# Altium PCB MachLoa.PcbDoc
Units mm, origin at the board's own origin, x right, y up, seen from the top; angles counter-clockwise.
Board outline 86.61 x 107.06 mm, 2 copper layers (Top Layer, Bottom Layer); 124 components, 20 nets, 344 pads, 16 vias.
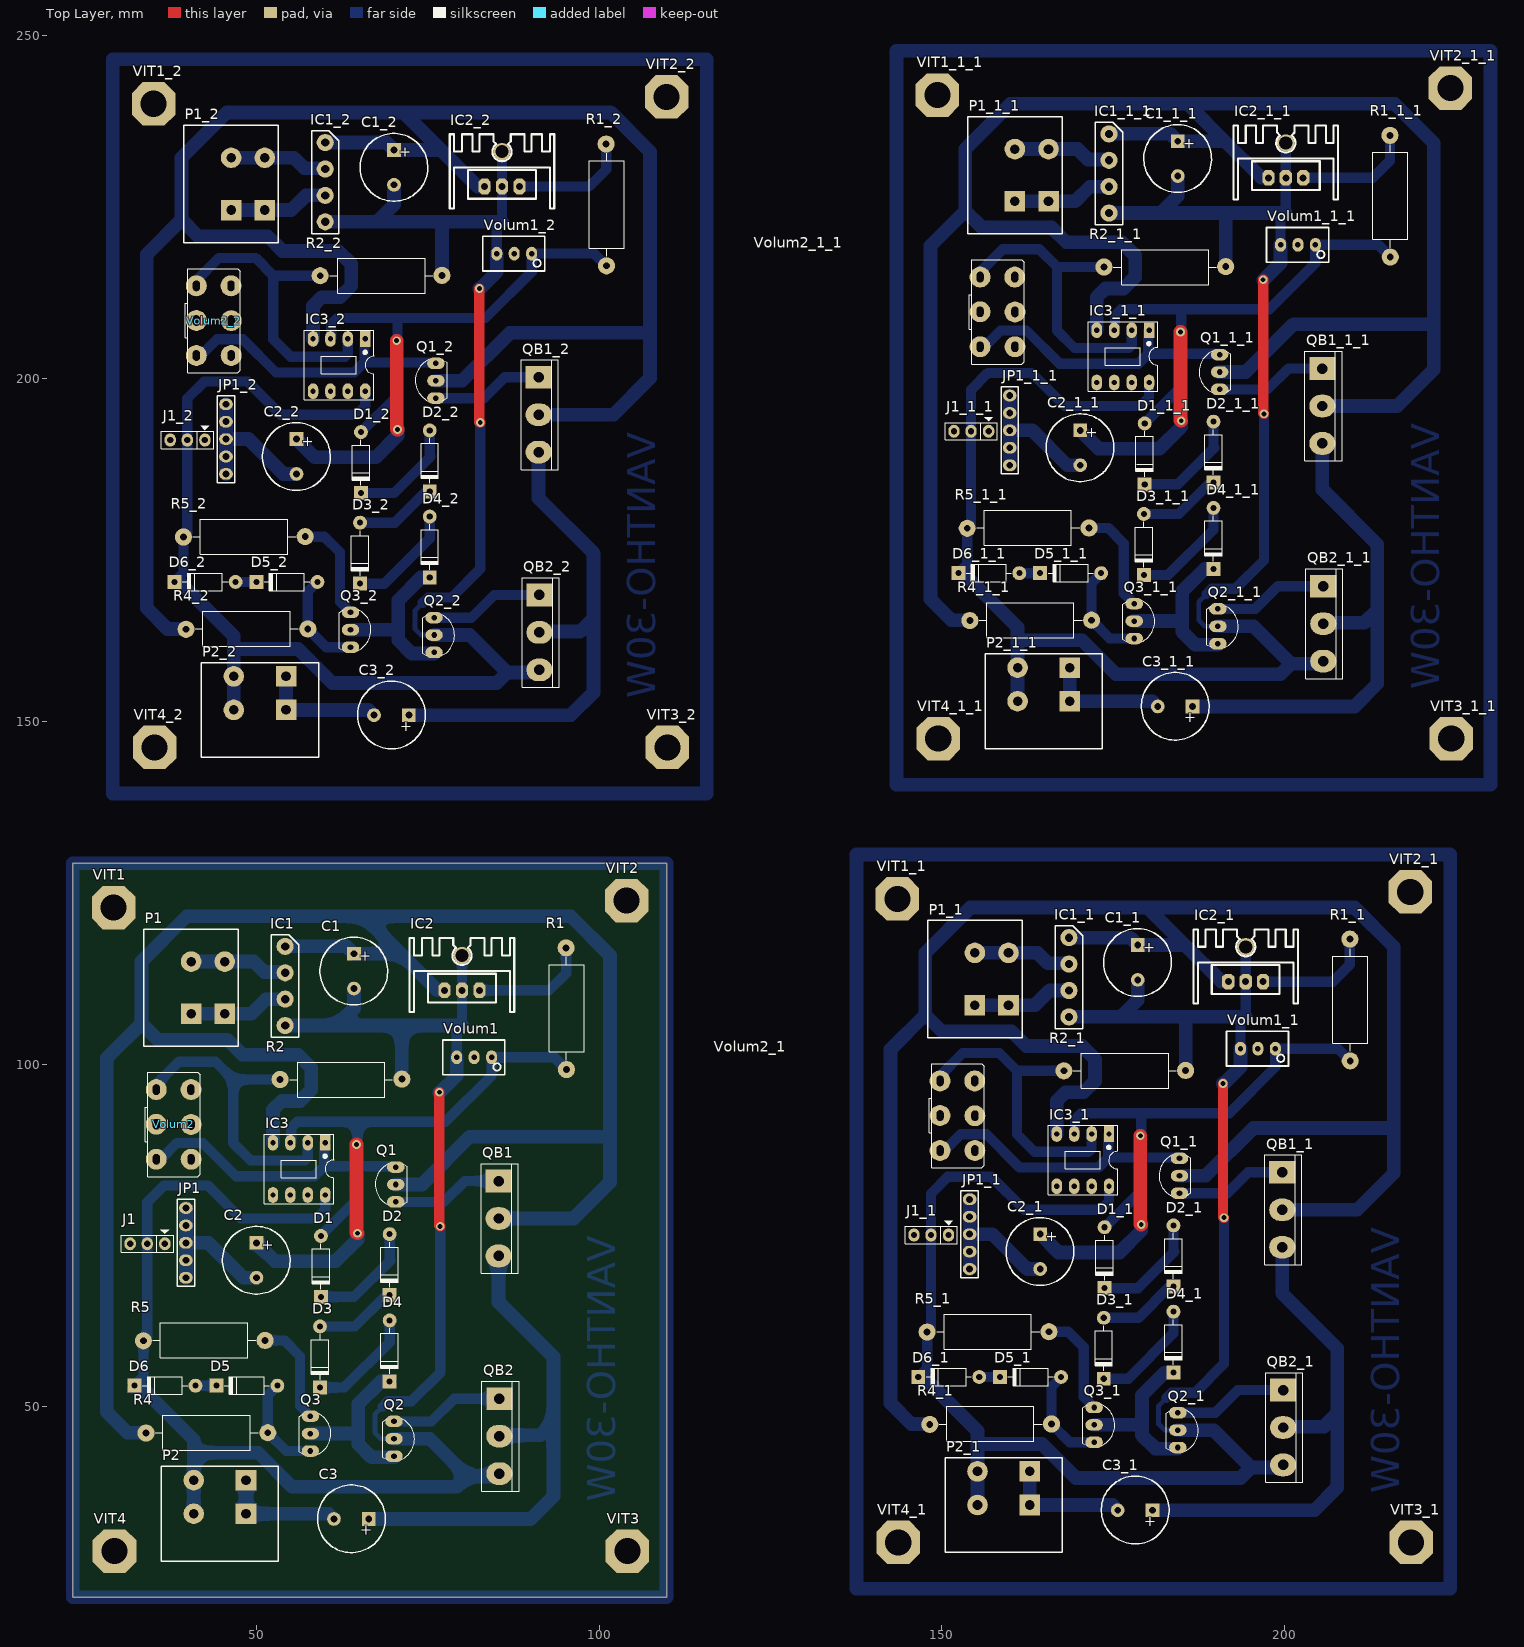
[diagram p0: Top Layer view]
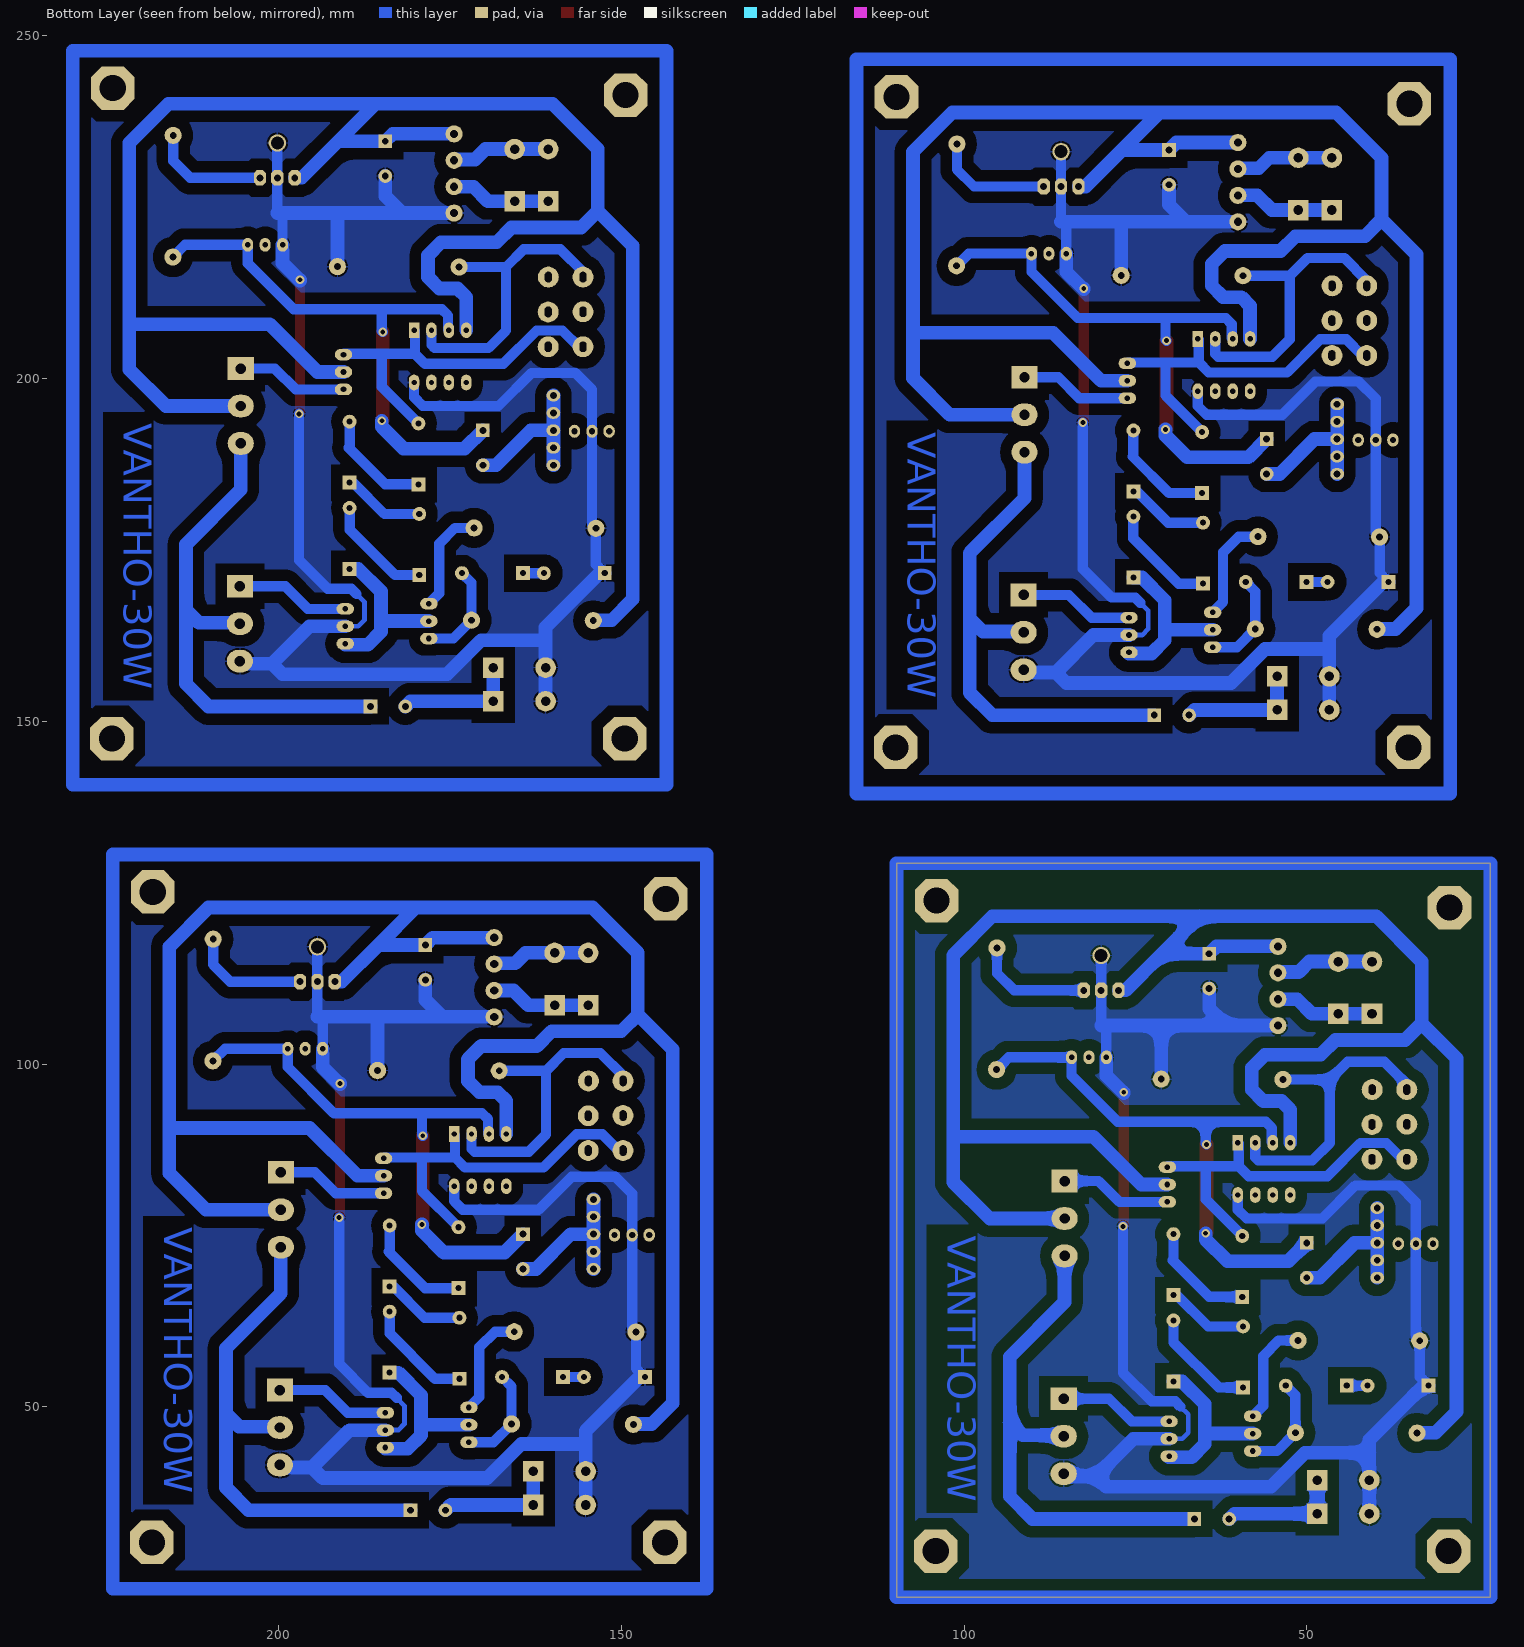
[diagram p1: Bottom Layer view, seen from below]

## Layer stack, top to bottom
Top Solder: solder mask 0.0102, Solder Resist, Dk 3.5
Top Layer: signal copper 0.0356
Dielectric 1: dielectric 0.32, FR-4, Dk 4.8
Bottom Layer: signal copper 0.0356
Bottom Solder: solder mask 0.0102, Solder Resist, Dk 3.5

## Board outline
23.241,22.225 23.241,129.286 109.855,129.286 109.855,22.225

## Design rules (kind name [scope] priority, off if disabled: settings)
Clearance [All] p1: gap=1.7 ignorepadtopadclearanceinfootprint=FALSE
PolygonConnect [All] p1: connectstyle=Relief reliefconductorwidth=0.254 reliefentries=4 polygonreliefangle="90 Angle" airgapwidth=0.254
RoutingVias [All] p1: holewidth=0.711 width=1.27 viastyle="Through Hole" minholewidth=0.711 minwidth=1.27 maxholewidth=0.711 maxwidth=1.27
SolderMaskExpansion [All] p1: expansion=0.102
Width [All] p1: maxlimit=2 minlimit=0.7 preferedwidth=1.5
30 further rules are at their usual default settings.

## Classes and differential pairs
component class MachLoa: C1 C2 C3 D1 D2 D3 D4 D5 D6 IC1 IC2 IC3 J1 JP1 P1 P2 Q1 Q2 Q3 QB1 QB2 R1 R2 R4 R5 VIT1 VIT2 VIT3 VIT4 Volum1 Volum2

## Components (designator, comment, footprint, x,y, rotation, side; value= is the part's Value field where it differs from the comment)
C1 "2200uF" C10mm 64.262,113.538 r270 top
C1_1 "2200uF" C10mm 178.562,114.808 r270 top (schematic designator C1)
C1_1_1 "2200uF" C10mm 184.404,232.029 r270 top (schematic designator C1)
C1_2 "2200uF" C10mm 70.104,230.759 r270 top (schematic designator C1)
C2 "4.7uF" C10mm 50.038,71.374 r270 top
C2_1 "4.7uF" C10mm 164.338,72.644 r270 top (schematic designator C2)
C2_1_1 "4.7uF" C10mm 170.18,189.865 r270 top (schematic designator C2)
C2_2 "4.7uF" C10mm 55.88,188.595 r270 top (schematic designator C2)
C3 "1000uF" C10mm 63.881,33.655 r180 top
C3_1 "1000uF" C10mm 178.181,34.925 r180 top (schematic designator C3)
C3_1_1 "1000uF" C10mm 184.023,152.146 r180 top (schematic designator C3)
C3_2 "1000uF" C10mm 69.723,150.876 r180 top (schematic designator C3)
D1 "1N4007" D1A 59.436,74.93 r90 top
D1_1 "1N4007" D1A 173.736,76.2 r90 top (schematic designator D1)
D1_1_1 "1N4007" D1A 179.578,193.421 r90 top (schematic designator D1)
D1_2 "1N4007" D1A 65.278,192.151 r90 top (schematic designator D1)
D2 "1N4007" D1A 69.469,75.184 r90 top
D2_1 "1N4007" D1A 183.769,76.454 r90 top (schematic designator D2)
D2_1_1 "1N4007" D1A 189.611,193.675 r90 top (schematic designator D2)
D2_2 "1N4007" D1A 75.311,192.405 r90 top (schematic designator D2)
D3 "1N4007" D1A 59.309,61.722 r90 top
D3_1 "1N4007" D1A 173.609,62.992 r90 top (schematic designator D3)
D3_1_1 "1N4007" D1A 179.451,180.213 r90 top (schematic designator D3)
D3_2 "1N4007" D1A 65.151,178.943 r90 top (schematic designator D3)
D4 "1N4007" D1A 69.469,62.611 r90 top
D4_1 "1N4007" D1A 183.769,63.881 r90 top (schematic designator D4)
D4_1_1 "1N4007" D1A 189.611,181.102 r90 top (schematic designator D4)
D4_2 "1N4007" D1A 75.311,179.832 r90 top (schematic designator D4)
D5 "1N4007" D1A 53.086,53.086 r0 top
D5_1 "1N4007" D1A 167.386,54.356 r0 top (schematic designator D5)
D5_1_1 "1N4007" D1A 173.228,171.577 r0 top (schematic designator D5)
D5_2 "1N4007" D1A 58.928,170.307 r0 top (schematic designator D5)
D6 "1N4007" D1A 41.148,53.086 r0 top
D6_1 "1N4007" D1A 155.448,54.356 r0 top (schematic designator D6)
D6_1_1 "1N4007" D1A 161.29,171.577 r0 top (schematic designator D6)
D6_2 "1N4007" D1A 46.99,170.307 r0 top (schematic designator D6)
IC1 "Diode Cau 3A 700V" "diode cau" 54.229,111.379 r270 top
IC1_1 "Diode Cau 3A 700V" "diode cau" 168.529,112.649 r270 top (schematic designator IC1)
IC1_1_1 "Diode Cau 3A 700V" "diode cau" 174.371,229.87 r270 top (schematic designator IC1)
IC1_2 "Diode Cau 3A 700V" "diode cau" 60.071,228.6 r270 top (schematic designator IC1)
IC2 "LM7805" QTO-220H3 77.47,110.744 r0 top
IC2_1 "LM7805" QTO-220H3 191.77,112.014 r0 top (schematic designator IC2)
IC2_1_1 "LM7805" QTO-220H3 197.612,229.235 r0 top (schematic designator IC2)
IC2_2 "LM7805" QTO-220H3 83.312,227.965 r0 top (schematic designator IC2)
IC3 "LM358" DIP8/W0.3 60.071,88.519 r180 top
IC3_1 "LM358" DIP8/W0.3 174.371,89.789 r180 top (schematic designator IC3)
IC3_1_1 "LM358" DIP8/W0.3 180.213,207.01 r180 top (schematic designator IC3)
IC3_2 "LM358" DIP8/W0.3 65.913,205.74 r180 top (schematic designator IC3)
J1 "Jumper 3" JP3 34.138,73.787 r180 top value=J3
J1_1 "Jumper 3" JP3 148.438,75.057 r180 top value=J3 (schematic designator J1)
J1_1_1 "Jumper 3" JP3 154.28,192.278 r180 top value=J3 (schematic designator J1)
J1_2 "Jumper 3" JP3 39.98,191.008 r180 top value=J3 (schematic designator J1)
JP1 "2.54_5P" "jump don duc 2.54_5p" 39.751,73.914 r90 top
JP1_1 "2.54_5P" "jump don duc 2.54_5p" 154.051,75.184 r90 top (schematic designator JP1)
JP1_1_1 "2.54_5P" "jump don duc 2.54_5p" 159.893,192.405 r90 top (schematic designator JP1)
JP1_2 "2.54_5P" "jump don duc 2.54_5p" 45.593,191.135 r90 top (schematic designator JP1)
P1 "KF25C_2P" KF25C_2P 47.413,102.58 r90 top
P1_1 "KF25C_2P" KF25C_2P 161.713,103.85 r90 top (schematic designator P1)
P1_1_1 "KF25C_2P" KF25C_2P 167.555,221.071 r90 top (schematic designator P1)
P1_2 "KF25C_2P" KF25C_2P 53.255,219.801 r90 top (schematic designator P1)
P2 "LOA" KF25C_2P 53.249,41.317 r180 top value=KF25C_2P
P2_1 "LOA" KF25C_2P 167.549,42.587 r180 top value=KF25C_2P (schematic designator P2)
P2_1_1 "LOA" KF25C_2P 173.391,159.808 r180 top value=KF25C_2P (schematic designator P2)
P2_2 "LOA" KF25C_2P 59.091,158.538 r180 top value=KF25C_2P (schematic designator P2)
Q1 "C1815" QTO-92 70.358,82.423 r90 top
Q1_1 "C1815" QTO-92 184.658,83.693 r90 top (schematic designator Q1)
Q1_1_1 "C1815" QTO-92 190.5,200.914 r90 top (schematic designator Q1)
Q1_2 "C1815" QTO-92 76.2,199.644 r90 top (schematic designator Q1)
Q2 "A1015" QTO-92 70.104,45.339 r270 top
Q2_1 "A1015" QTO-92 184.404,46.609 r270 top (schematic designator Q2)
Q2_1_1 "A1015" QTO-92 190.246,163.83 r270 top (schematic designator Q2)
Q2_2 "A1015" QTO-92 75.946,162.56 r270 top (schematic designator Q2)
Q3 "C1815" QTO-92 57.912,46.101 r270 top
Q3_1 "C1815" QTO-92 172.212,47.371 r270 top (schematic designator Q3)
Q3_1_1 "C1815" QTO-92 178.054,164.592 r270 top (schematic designator Q3)
Q3_2 "C1815" QTO-92 63.754,163.322 r270 top (schematic designator Q3)
QB1 "D718" QTO-247 85.344,82.931 r270 top
QB1_1 "D718" QTO-247 199.644,84.201 r270 top (schematic designator QB1)
QB1_1_1 "D718" QTO-247 205.486,201.422 r270 top (schematic designator QB1)
QB1_2 "D718" QTO-247 91.186,200.152 r270 top (schematic designator QB1)
QB2 "B688" QTO-247 85.471,51.181 r270 top
QB2_1 "B688" QTO-247 199.771,52.451 r270 top (schematic designator QB2)
QB2_1_1 "B688" QTO-247 205.613,169.672 r270 top (schematic designator QB2)
QB2_2 "B688" QTO-247 91.313,168.402 r270 top (schematic designator QB2)
R1 "100K" R2W 95.25,99.187 r90 top value="R2W - 47"
R1_1 "100K" R2W 209.55,100.457 r90 top value="R2W - 47" (schematic designator R1)
R1_1_1 "100K" R2W 215.392,217.678 r90 top value="R2W - 47" (schematic designator R1)
R1_2 "100K" R2W 101.092,216.408 r90 top value="R2W - 47" (schematic designator R1)
R2 "4.7K" R2W 53.492,97.739 r0 top value="R2W - 47"
R2_1 "4.7K" R2W 167.792,99.009 r0 top value="R2W - 47" (schematic designator R2)
R2_1_1 "4.7K" R2W 173.634,216.23 r0 top value="R2W - 47" (schematic designator R2)
R2_2 "4.7K" R2W 59.334,214.96 r0 top value="R2W - 47" (schematic designator R2)
R4 "100K" R2W 51.689,46.228 r180 top value="R2W - 47"
R4_1 "100K" R2W 165.989,47.498 r180 top value="R2W - 47" (schematic designator R4)
R4_1_1 "100K" R2W 171.831,164.719 r180 top value="R2W - 47" (schematic designator R4)
R4_2 "100K" R2W 57.531,163.449 r180 top value="R2W - 47" (schematic designator R4)
R5 "560" R2W 51.308,59.69 r180 top value="R2W - 47"
R5_1 "560" R2W 165.608,60.96 r180 top value="R2W - 47" (schematic designator R5)
R5_1_1 "560" R2W 171.45,178.181 r180 top value="R2W - 47" (schematic designator R5)
R5_2 "560" R2W 57.15,176.911 r180 top value="R2W - 47" (schematic designator R5)
VIT1 "1" VIT 29.21,122.809 r0 top
VIT1_1 "1" VIT 143.51,124.079 r0 top (schematic designator VIT1)
VIT1_1_1 "1" VIT 149.352,241.3 r0 top (schematic designator VIT1)
VIT1_2 "1" VIT 35.052,240.03 r0 top (schematic designator VIT1)
VIT2 "1" VIT 104.013,123.825 r0 top
VIT2_1 "1" VIT 218.313,125.095 r0 top (schematic designator VIT2)
VIT2_1_1 "1" VIT 224.155,242.316 r0 top (schematic designator VIT2)
VIT2_2 "1" VIT 109.855,241.046 r0 top (schematic designator VIT2)
VIT3 "1" VIT 104.14,28.956 r0 top
VIT3_1 "1" VIT 218.44,30.226 r0 top (schematic designator VIT3)
VIT3_1_1 "1" VIT 224.282,147.447 r0 top (schematic designator VIT3)
VIT3_2 "1" VIT 109.982,146.177 r0 top (schematic designator VIT3)
VIT4 "1" VIT 29.337,28.956 r0 top
VIT4_1 "1" VIT 143.637,30.226 r0 top (schematic designator VIT4)
VIT4_1_1 "1" VIT 149.479,147.447 r0 top (schematic designator VIT4)
VIT4_2 "1" VIT 35.179,146.177 r0 top (schematic designator VIT4)
Volum1 "50K" "BIEN TRO VI CHINH Dung" 81.788,100.965 r180 top value="Volume Dual 50K"
Volum1_1 "50K" "BIEN TRO VI CHINH Dung" 196.088,102.235 r180 top value="Volume Dual 50K" (schematic designator Volum1)
Volum1_1_1 "50K" "BIEN TRO VI CHINH Dung" 201.93,219.456 r180 top value="Volume Dual 50K" (schematic designator Volum1)
Volum1_2 "50K" "BIEN TRO VI CHINH Dung" 87.63,218.186 r180 top value="Volume Dual 50K" (schematic designator Volum1)
Volum2 "50K" VOL-D 35.433,91.186 r270 top value="Volume Dual 50K"
Volum2_1 "50K" VOL-D 149.733,92.456 r270 top value="Volume Dual 50K" (schematic designator Volum2)
Volum2_1_1 "50K" VOL-D 155.575,209.677 r270 top value="Volume Dual 50K" (schematic designator Volum2)
Volum2_2 "50K" VOL-D 41.275,208.407 r270 top value="Volume Dual 50K" (schematic designator Volum2)

## Footprints (in the part's own frame and the unit in brackets; to place one, negate y for a bottom-side part, rotate by r counter-clockwise, add the part's x,y. Pads: shape width x height; smd on the part's side, far side on the other; paste and mask are expansions set on the pad)
"BIEN TRO VI CHINH Dung" [mm] "Bien tro vi chinh"
  oval 1.6x2 hole 0.8: 1(-2.54,0) 2(0,0) 3(2.54,0)
  silkscreen extent -4.47,-2.54 4.6,2.54, body extent -4.54,-2.4 4.66,2.4, height 12.02
C10mm [mm]
  rect 2x2 hole 1: 1(-2.54,0)
  round 2 hole 1: 2(2.54,0)
  silkscreen extent -4.95,-4.96 4.93,4.92, body extent -5,-5 4.97,5, height 20.01
D1A [mil] "Diode 1A, W 100mil, L 350mil"
  round 80 hole 35: 1(0,0)
  rect 80x80 hole 35: 2(-350,0)
  silkscreen extent -305,-50 -45,50, body extent -386,-33 34,36, height 84
"diode cau" [mm]
  round 2.5 hole 1.2 mask+0.102: 1(-5.775,0) 2(-1.925,0) 3(1.925,0) 4(5.775,0)
  silkscreen extent -7.5,-2 7.5,2, body extent -7.37,-2.42 7.36,2.41, height 12.19
DIP8/W0.3 [mil] "8 PIN, W 300mil, Pin to pin 100mil"
  rect 60x90 hole 31: 1(0,0)
  oval 60x90 hole 31: 2(100,0) 3(200,0) 4(300,0) 5(300,300) 6(200,300) 7(100,300) 8(0,300)
  silkscreen extent -50,-50 350,350, body extent -50,-40 350,336, height 201
JP3 [mil] "Jumper 3"
  oval 65x75 hole 36: 1(-100,0) 2(1,0) 3(99,0)
  silkscreen extent -150,-81 150,50, body extent -150,-60 150,55, height 355
"jump don duc 2.54_5p" [mm]
  oval 1.7x2 hole 1 mask+0.102: 1(-5.08,0) 2(-2.54,0) 3(0,0) 4(2.54,0) 5(5.08,0)
  silkscreen extent -6.35,-1.27 6.35,1.27, body extent -6.35,-1.25 6.35,1.25, height 8.55
KF25C_2P [mm]
  rect 3x3 hole 1.4: 1(4.735,6.9) 1(4.735,2)
  round 3 hole 1.4: 2(12.355,2) 2(12.355,6.9)
  silkscreen extent 0,0 17.09,13.8, body extent 0.92,0.6 16.16,10.6, height 10.4
QTO-92 [mil] "TO-92"
  oval 66x100 hole 32: 1(-100,0) 2(0,0) 3(100,0)
  silkscreen extent -117,-65 120,118, body extent -109,-66 109,95, height 245
QTO-220H3 [mil] "TO-220 1-2-3"
  oct 70x90 hole 40: 1(0,0) 2(100,0) 3(200,0)
  round 100 hole 75: 2(100,200)
  silkscreen extent -200,-125 400,300, body extent -190,-102 392,323, height 984
QTO-247 [mil] "TO-247"
  rect 130x150 hole 60: 1(0,0)
  oval 130x150 hole 60: 2(215,0) 3(430,0)
  silkscreen extent -100,-100 530,113, body extent -89,-78 511,102, height 941
R2W [mm] "R2W, 2 pin, 700mil"
  round 2.5 hole 1: 1(0,0) 2(17.755,0.051)
  silkscreen extent 1.37,-2.57 16.38,2.54, body extent -2.36,-3.33 19.84,3.27, height 8.3
VIT [mm] "VIT"
  oct 6.35x6.35 hole 3.81: VIT1(0,0)
VOL-D [mil] "Volume control Dual"
  round 120 hole 40 slot 60 at 0 deg: 1(-200,0) 2(-1,0) 3(200,0) 4(-200,199) 5(0,200) 6(200,200)
  silkscreen extent -299,-63 300,253, body extent -339,-1309 331,299, height 835

## Part data
C1 C1_1 C1_1_1 C1_2 C2 C2_1 C2_1_1 C2_2 C3 C3_1 C3_1_1 C3_2: library part "Cap Pol 12mm", "Polarized Capacitor (Axial)", LatestRevisionDate=17-Jul-2002, LatestRevisionNote="Re-released for DXP Platform.", PackageReference=POLAR0.8, Published=8-Jun-2000, Publisher="Altium Limited"
D1 D1_1 D1_1_1 D1_2 D2 D2_1 D2_1_1 D2_2 D3 D3_1 D3_1_1 D3_2 D4 D4_1 D4_1_1 D4_2 D5 D5_1 D5_1_1 D5_2 D6 D6_1 D6_1_1 D6_2: library part D1A, "Diode 1A"
IC1 IC1_1 IC1_1_1 IC1_2: "C?m", Chung_Loai=C?m, Don_Vi=Con, Ma_Hang=MH001207, So_Chan=4, Ten_Linh_Kien="Diode C?u 3A 700V KBP307 (Vuông)"
IC2 IC2_1 IC2_1_1 IC2_2: library part LM78xx, "On ap +, from + 5 to + 24VDC", =LM7808
IC3 IC3_1 IC3_1_1 IC3_2: "Low-Power Dual Operational Amplifier"
J1 J1_1 J1_1_1 J1_2: library part JP3
JP1 JP1_1 JP1_1_1 JP1_2: library part "Jump Don Duc 2.54_5P", "C?m", Chung_Loai=C?m, Don_Vi=Con, Ma_Hang=MH000903, So_Chan=5, Ten_Linh_Kien="Jump Ðon Ð?c 2.54MM 2x40P Th?ng 11MM"
P1 P1_1 P1_1_1 P1_2: "Header, 2-Pin, pitch 7.62mm", MPN=KF25C_2P, Solder=WAVE
P2 P2_1 P2_1_1 P2_2: library part KF25C_2P, "Header, 2-Pin, pitch 7.62mm", MPN=KF25C_2P, Solder=WAVE
Q1 Q1_1 Q1_1_1 Q1_2 Q3 Q3_1 Q3_1_1 Q3_2: "NPN 600mW, ECB", =C2383
Q2 Q2_1 Q2_1_1 Q2_2: "PNP 600mW, ECB", =A1013
QB1 QB1_1 QB1_1_1 QB1_2 QB2 QB2_1 QB2_1_1 QB2_2: "Transistor Power Supply"
R1 R1_1 R1_1_1 R1_2 R2 R2_1 R2_1_1 R2_2 R4 R4_1 R4_1_1 R4_2 R5 R5_1 R5_1_1 R5_2: library part R2W, "Resistor 2W"
VIT1 VIT1_1 VIT1_1_1 VIT1_2 VIT2 VIT2_1 VIT2_1_1 VIT2_2 VIT3 VIT3_1 VIT3_1_1 VIT3_2 VIT4 VIT4_1 VIT4_1_1 VIT4_2: library part VIT, "Oc Vit"
Volum1 Volum1_1 Volum1_1_1 Volum1_2 Volum2 Volum2_1 Volum2_1_1 Volum2_2: library part VOL-D, "Volume control Dual"

## Via types
v1: diameter 1.27, hole 0.711, Top Layer to Bottom Layer, 16 vias

## Nets (pads, with @x,y where several pads share a name; then routed paths per layer and width w, separated by ;. In a path a pad name is that pad's centre, name@x,y a point inside that pad or via, vN(x,y) a via of type N, cw(c..) or ccw(c..) an arc to the next point about the centre after c; other vN are vias at no path point)
19V: C1.1 IC1.1 IC2.1 IC3.4 Q1.2 QB1.2 R4.2 | length 309.7
  Bottom Layer w2: R4.2 33.884,46.228 31.242,46.228 28.194,49.276 28.194,100.838 33.274,105.918 ; IC3.4 52.451,93.345 53.721,94.615 56.388,94.615 58.039,96.266 58.039,99.441 56.134,101.346 48.006,101.346 45.847,103.505 35.687,103.505 33.274,105.918 ; IC1.1 63.186,117.154 C1.1 71.12,116.078 ; Q1.2 74.168,82.423 81.153,89.408 101.6,89.408 ; IC2.1@77.421,110.744 76.454,110.744 71.12,116.078 ; QB1.2 96.266,77.47 101.6,82.804 101.6,89.408 ; 33.274,105.918 33.274,114.935 39.878,121.539 65.659,121.539 ; 65.659,121.539 95.885,121.539 101.6,115.824 101.6,89.408 ; 65.659,121.539 71.12,116.078
+5: IC2.3 R1.2 | length 17.4
  Bottom Layer w1.5: IC2.3 92.71,110.744 95.199,113.233 R1.2
GND: C1.2 D6.2 IC1.4 IC2.2 IC3.8 J1.2 P2.2 Q2.2 QB2.3 R2.2 R5.2 Volum1.3 | length 261.6
  Top Layer w1.5: v1(76.708,95.885) 76.708,76.454 v1(76.835,76.327)
  Bottom Layer w0.7: 68.453,50.038 67.31,48.895 67.31,46.228 68.199,45.339 Q2.2
  Bottom Layer w1.5: D6.2 33.553,54.381 R5.2 34.112,60.198 J1.2 34.112,79.832 36.576,82.296 42.926,82.296 47.752,77.47 58.801,77.47 60.071,78.74 IC3.8 ; 68.453,50.038 69.215,50.8 72.644,50.8 76.835,54.991 v1(76.835,76.327) ; Volum1.3 79.248,104.902 ; 80.01,105.604 80.01,110.744 IC2.2@80.01,115.824
  Bottom Layer w2: D6.2 33.02,53.086 40.894,45.212 40.894,43.307 ; P2.2@40.894,34.417 40.894,39.317 40.894,43.307 ; IC1.4 61.789,105.604 ; C1.2 64.262,108.077 61.789,105.604 ; Q2.2 75.311,45.339 80.772,39.878 ; R2.2 71.247,105.604 ; v1(76.708,95.885) 76.708,95.758 79.248,98.298 Volum1.3 ; 80.01,105.604 71.247,105.604 ; QB2.3 85.09,39.878 80.772,39.878 ; 40.894,43.307 50.292,43.307 55.245,38.354 79.248,38.354 80.772,39.878 ; 61.789,105.604 71.247,105.604
NetC2_1: C2.1 IC3.3 R1.1 Volum1.1 | length 83.3
  Top Layer w2: v1(64.643,88.265) 64.643,75.438 v1(64.77,75.311)
  Bottom Layer w1.5: IC3.3 55.118,88.646 55.118,90.678 56.007,91.567 64.77,91.567 ; v1(64.643,88.265) 64.77,88.392 64.77,91.567 ; R1.1 93.472,100.965 Volum1.1 84.328,98.298 77.597,91.567 64.77,91.567
  Bottom Layer w2: C2.1 52.705,71.247 61.595,71.247 64.77,74.422 v1(64.77,75.311)
NetC2_2: C2.2 JP1.1 JP1.2 JP1.3 JP1.4 JP1.5 | length 22.6
  Bottom Layer w2: JP1.1 JP1.2 JP1.3 ; JP1.5 JP1.4 JP1.3 ; C2.2 48.133,68.834 43.053,73.914 JP1.3
NetC3_1: C3.1 QB1.3 QB2.2 | length 75.4
  Bottom Layer w2: C3.1 90.043,33.655 93.345,36.957 93.345,47.752 ; QB1.3 85.344,65.278 93.345,57.277 93.345,47.752 ; QB2.2 85.598,45.847 91.44,45.847 93.345,47.752
NetC3_2: C3.2 P2.1 | length 18
  Bottom Layer w2: P2.1@48.514,39.317 48.514,34.417 60.579,34.417 C3.2
NetD1_1: D1.1 IC3.1 Q1.3 Volum2.3 | length 54.4
  Bottom Layer w1.5: Volum2.3 36.068,86.106 38.442,88.48 42.203,88.48 47.053,83.629 58.483,83.629 59.944,85.09 ; D1.1 64.77,80.264 64.77,85.09 ; IC3.1 59.944,88.392 59.944,85.09 ; Q1.3 70.231,85.09 64.77,85.09 ; 59.944,85.09 64.77,85.09
NetD1_2: D1.2 D2.1 | length 16.2
  Bottom Layer w1.5: D1.2 64.262,66.04 69.596,71.374 69.469,71.501 D2.1
NetD2_2: D2.2 D3.1 | length 12.1
  Bottom Layer w1.5: D3.1 64.389,61.722 68.961,66.294 D2.2
NetD3_2: D3.2 D4.1 | length 16.1
  Bottom Layer w1.5: D3.2 62.865,52.832 69.469,59.436 D4.1
NetD4_2: D4.2 Q2.3 Q3.2 | length 24.9
  Bottom Layer w2: Q3.2 64.516,46.101 64.897,46.482 ; D4.2 68.199,53.721 64.897,50.419 64.897,46.482 ; Q2.3@70.104,42.639 66.835,42.639 64.897,44.577 64.897,46.482
NetD5_1: D5.1 Q3.3 R4.1 | length 14.8
  Bottom Layer w1.5: D5.1 51.689,51.689 R4.1 54.356,43.561 Q3.3
NetD5_2: D5.2 D6.1 | length 3
  Bottom Layer w1.5: D6.1 D5.2
NetIC1_2: IC1.2 P1.2 | length 14.4
  Bottom Layer w2: P1.2@40.513,114.935 45.413,114.935 49.657,114.935 51.181,113.411 54.122,113.411 IC1.2
NetIC1_3: IC1.3 P1.1 | length 14.6
  Bottom Layer w2: P1.1@40.513,107.315 45.413,107.315 49.276,107.315 51.415,109.454 IC1.3
NetIC3_2: IC3.2 R2.1 Volum2.1 | length 44.8
  Bottom Layer w1.5: Volum2.1 35.433,97.028 38.735,100.33 44.069,100.33 46.66,97.739 ; R2.1 46.66,97.739 ; IC3.2 57.531,86.36 57.097,85.926 49.202,85.926 46.66,88.468 46.66,97.739
NetQ1_1: Q1.1 QB1.1 | length 16.2
  Bottom Layer w1.5: Q1.1 77.343,79.883 80.391,82.931 QB1.1
NetQ2_1: Q2.1 QB2.1 | length 16.7
  Bottom Layer w1.5: Q2.1 75.565,47.879 78.867,51.181 QB2.1
NetQ3_1: Q3.1 R5.1 | length 15.4
  Bottom Layer w1.5: R5.1 54.102,59.69 56.388,57.404 56.388,50.165 Q3.1
pads on no net: C1_1.1 C1_1.2 C1_1_1.1 C1_1_1.2 C1_2.1 C1_2.2 C2_1.1 C2_1.2 C2_1_1.1 C2_1_1.2 C2_2.1 C2_2.2 C3_1.1 C3_1.2 C3_1_1.1 C3_1_1.2 C3_2.1 C3_2.2 D1_1.1 D1_1.2 D1_1_1.1 D1_1_1.2 D1_2.1 D1_2.2 D2_1.1 D2_1.2 D2_1_1.1 D2_1_1.2 D2_2.1 D2_2.2 D3_1.1 D3_1.2 D3_1_1.1 D3_1_1.2 D3_2.1 D3_2.2 D4_1.1 D4_1.2 D4_1_1.1 D4_1_1.2 D4_2.1 D4_2.2 D5_1.1 D5_1.2 D5_1_1.1 D5_1_1.2 D5_2.1 D5_2.2 D6_1.1 D6_1.2 D6_1_1.1 D6_1_1.2 D6_2.1 D6_2.2 IC1_1.1 IC1_1.2 IC1_1.3 IC1_1.4 IC1_1_1.1 IC1_1_1.2 IC1_1_1.3 IC1_1_1.4 IC1_2.1 IC1_2.2 IC1_2.3 IC1_2.4 IC2_1.1 IC2_1.2 IC2_1.3 IC2_1_1.1 IC2_1_1.2 IC2_1_1.3 IC2_2.1 IC2_2.2 IC2_2.3 IC3.5 IC3.6 IC3.7 IC3_1.1 IC3_1.2 IC3_1.3 IC3_1.4 IC3_1.5 IC3_1.6 IC3_1.7 IC3_1.8 IC3_1_1.1 IC3_1_1.2 IC3_1_1.3 IC3_1_1.4 IC3_1_1.5 IC3_1_1.6 IC3_1_1.7 IC3_1_1.8 IC3_2.1 IC3_2.2 IC3_2.3 IC3_2.4 IC3_2.5 IC3_2.6 IC3_2.7 IC3_2.8 J1.1 J1.3 J1_1.1 J1_1.2 J1_1.3 J1_1_1.1 J1_1_1.2 J1_1_1.3 J1_2.1 J1_2.2 J1_2.3 JP1_1.1 JP1_1.2 JP1_1.3 JP1_1.4 JP1_1.5 JP1_1_1.1 JP1_1_1.2 JP1_1_1.3 JP1_1_1.4 JP1_1_1.5 JP1_2.1 JP1_2.2 JP1_2.3 JP1_2.4 JP1_2.5 P1_1.1 P1_1.2 P1_1_1.1 P1_1_1.2 P1_2.1 P1_2.2 P2_1.1 P2_1.2 P2_1_1.1 P2_1_1.2 P2_2.1 P2_2.2 Q1_1.1 Q1_1.2 Q1_1.3 Q1_1_1.1 Q1_1_1.2 Q1_1_1.3 Q1_2.1 Q1_2.2 Q1_2.3 Q2_1.1 Q2_1.2 Q2_1.3 Q2_1_1.1 Q2_1_1.2 Q2_1_1.3 Q2_2.1 Q2_2.2 Q2_2.3 Q3_1.1 Q3_1.2 Q3_1.3 Q3_1_1.1 Q3_1_1.2 Q3_1_1.3 Q3_2.1 Q3_2.2 Q3_2.3 QB1_1.1 QB1_1.2 QB1_1.3 QB1_1_1.1 QB1_1_1.2 QB1_1_1.3 QB1_2.1 QB1_2.2 QB1_2.3 QB2_1.1 QB2_1.2 QB2_1.3 QB2_1_1.1 QB2_1_1.2 QB2_1_1.3 QB2_2.1 QB2_2.2 QB2_2.3 R1_1.1 R1_1.2 R1_1_1.1 R1_1_1.2 R1_2.1 R1_2.2 R2_1.1 R2_1.2 R2_1_1.1 R2_1_1.2 R2_2.1 R2_2.2 R4_1.1 R4_1.2 R4_1_1.1 R4_1_1.2 R4_2.1 R4_2.2 R5_1.1 R5_1.2 R5_1_1.1 R5_1_1.2 R5_2.1 R5_2.2 VIT1.VIT1 VIT1_1.VIT1 VIT1_1_1.VIT1 VIT1_2.VIT1 VIT2.VIT1 VIT2_1.VIT1 VIT2_1_1.VIT1 VIT2_2.VIT1 VIT3.VIT1 VIT3_1.VIT1 VIT3_1_1.VIT1 VIT3_2.VIT1 VIT4.VIT1 VIT4_1.VIT1 VIT4_1_1.VIT1 VIT4_2.VIT1 Volum1.2 Volum1_1.1 Volum1_1.2 Volum1_1.3 Volum1_1_1.1 Volum1_1_1.2 Volum1_1_1.3 Volum1_2.1 Volum1_2.2 Volum1_2.3 Volum2.2 Volum2.4 Volum2.5 Volum2.6 Volum2_1.1 Volum2_1.2 Volum2_1.3 Volum2_1.4 Volum2_1.5 Volum2_1.6 Volum2_1_1.1 Volum2_1_1.2 Volum2_1_1.3 Volum2_1_1.4 Volum2_1_1.5 Volum2_1_1.6 Volum2_2.1 Volum2_2.2 Volum2_2.3 Volum2_2.4 Volum2_2.5 Volum2_2.6
copper on no net: | length 4704.3
  Top Layer w1.5: v1(82.55,213.106) 82.55,193.675 v1(82.677,193.548) ; v1(191.008,97.155) 191.008,77.724 v1(191.135,77.597) ; v1(196.85,214.376) 196.85,194.945 v1(196.977,194.818)
  Top Layer w2: v1(70.485,205.486) 70.485,192.659 v1(70.612,192.532) ; v1(178.943,89.535) 178.943,76.708 v1(179.07,76.581) ; v1(184.785,206.756) 184.785,193.929 v1(184.912,193.802)
  Bottom Layer w0.7: 74.295,167.259 73.152,166.116 73.152,163.449 74.041,162.56 75.946,162.56 ; 182.753,51.308 181.61,50.165 181.61,47.498 182.499,46.609 184.404,46.609 ; 188.595,168.529 187.452,167.386 187.452,164.719 188.341,163.83 190.246,163.83
  Bottom Layer w1.5: 38.1,170.307 39.395,171.602 39.395,176.86 39.954,177.419 39.954,191.008 39.954,197.053 42.418,199.517 48.768,199.517 53.594,194.691 64.643,194.691 65.913,195.961 65.913,198.12 ; 41.275,203.327 41.91,203.327 44.284,205.701 48.045,205.701 52.895,200.85 64.325,200.85 65.786,202.311 ; 41.275,213.487 41.275,214.249 44.577,217.551 49.911,217.551 52.502,214.96 ; 46.99,170.307 50.038,170.307 ; 57.15,176.911 59.944,176.911 62.23,174.625 62.23,167.386 63.754,165.862 ; 58.928,170.307 57.531,168.91 57.531,163.449 60.198,160.782 63.754,160.782 ; 59.334,214.96 52.502,214.96 ; 60.833,205.74 60.96,205.867 60.96,207.899 61.849,208.788 70.612,208.788 ; 63.373,205.74 63.373,203.581 62.939,203.147 55.044,203.147 52.502,205.689 52.502,214.96 ; 65.151,170.053 68.707,170.053 75.311,176.657 75.311,179.832 ; 65.151,178.943 70.231,178.943 74.803,183.515 75.311,183.515 ; 65.278,183.261 70.104,183.261 75.438,188.595 75.311,188.722 75.311,192.405 ; 65.278,192.151 70.612,197.485 70.612,202.311 ; 65.913,205.74 65.786,205.613 65.786,202.311 ; v1(70.485,205.486) 70.612,205.613 70.612,208.788 ; 74.295,167.259 75.057,168.021 78.486,168.021 82.677,172.212 v1(82.677,193.548) ; 75.946,165.1 81.407,165.1 84.709,168.402 91.313,168.402 ; 76.2,197.104 83.185,197.104 86.233,200.152 91.186,200.152 ; 76.2,202.184 76.073,202.311 70.612,202.311 ; 85.09,218.186 85.09,222.123 ; 85.852,222.825 85.852,227.965 85.852,233.045 ; 88.392,227.965 98.552,227.965 101.041,230.454 101.041,234.163 ; 101.092,216.408 99.314,218.186 90.17,218.186 90.17,215.519 83.439,208.788 70.612,208.788 ; 146.558,54.356 147.853,55.651 147.853,60.909 148.412,61.468 148.412,75.057 148.412,81.102 150.876,83.566 157.226,83.566 162.052,78.74 173.101,78.74 174.371,80.01 174.371,82.169 ; 149.733,87.376 150.368,87.376 152.742,89.75 156.503,89.75 161.353,84.9 172.784,84.9 174.244,86.36 ; 149.733,97.536 149.733,98.298 153.035,101.6 158.369,101.6 160.96,99.009 ; 152.4,171.577 153.695,172.872 153.695,178.13 154.254,178.689 154.254,192.278 154.254,198.323 156.718,200.787 163.068,200.787 167.894,195.961 178.943,195.961 180.213,197.231 180.213,199.39 ; 155.448,54.356 158.496,54.356 ; 155.575,204.597 156.21,204.597 158.584,206.971 162.345,206.971 167.195,202.12 178.625,202.12 180.086,203.581 ; 155.575,214.757 155.575,215.519 158.877,218.821 164.211,218.821 166.802,216.23 ; 161.29,171.577 164.338,171.577 ; 165.608,60.96 168.402,60.96 170.688,58.674 170.688,51.435 172.212,49.911 ; 167.386,54.356 165.989,52.959 165.989,47.498 168.656,44.831 172.212,44.831 ; 167.792,99.009 160.96,99.009 ; 169.291,89.789 169.418,89.916 169.418,91.948 170.307,92.837 179.07,92.837 ; 171.45,178.181 174.244,178.181 176.53,175.895 176.53,168.656 178.054,167.132 ; 171.831,89.789 171.831,87.63 171.397,87.196 163.502,87.196 160.96,89.738 160.96,99.009 ; 173.228,171.577 171.831,170.18 171.831,164.719 174.498,162.052 178.054,162.052 ; 173.609,54.102 177.165,54.102 183.769,60.706 183.769,63.881 ; 173.609,62.992 178.689,62.992 183.261,67.564 183.769,67.564 ; 173.634,216.23 166.802,216.23 ; 173.736,67.31 178.562,67.31 183.896,72.644 183.769,72.771 183.769,76.454 ; 173.736,76.2 179.07,81.534 179.07,86.36 ; 174.371,89.789 174.244,89.662 174.244,86.36 ; 175.133,207.01 175.26,207.137 175.26,209.169 176.149,210.058 184.912,210.058 ; 177.673,207.01 177.673,204.851 177.239,204.417 169.344,204.417 166.802,206.959 166.802,216.23 ; v1(178.943,89.535) 179.07,89.662 179.07,92.837 ; 179.451,171.323 183.007,171.323 189.611,177.927 189.611,181.102 ; 179.451,180.213 184.531,180.213 189.103,184.785 189.611,184.785 ; 179.578,184.531 184.404,184.531 189.738,189.865 189.611,189.992 189.611,193.675 ; 179.578,193.421 184.912,198.755 184.912,203.581 ; 180.213,207.01 180.086,206.883 180.086,203.581 ; 182.753,51.308 183.515,52.07 186.944,52.07 191.135,56.261 v1(191.135,77.597) ; 184.404,49.149 189.865,49.149 193.167,52.451 199.771,52.451 ; 184.658,81.153 191.643,81.153 194.691,84.201 199.644,84.201 ; 184.658,86.233 184.531,86.36 179.07,86.36 ; v1(184.785,206.756) 184.912,206.883 184.912,210.058 ; 188.595,168.529 189.357,169.291 192.786,169.291 196.977,173.482 v1(196.977,194.818) ; 190.246,166.37 195.707,166.37 199.009,169.672 205.613,169.672 ; 190.5,198.374 197.485,198.374 200.533,201.422 205.486,201.422 ; 190.5,203.454 190.373,203.581 184.912,203.581 ; 193.548,102.235 193.548,106.172 ; 194.31,106.874 194.31,112.014 194.31,117.094 ; 196.85,112.014 207.01,112.014 209.499,114.503 209.499,118.212 ; 199.39,219.456 199.39,223.393 ; 200.152,224.095 200.152,229.235 200.152,234.315 ; 202.692,229.235 212.852,229.235 215.341,231.724 215.341,235.433 ; 209.55,100.457 207.772,102.235 198.628,102.235 198.628,99.568 191.897,92.837 179.07,92.837 ; 215.392,217.678 213.614,219.456 204.47,219.456 204.47,216.789 197.739,210.058 184.912,210.058 ; 65.786,202.311 70.612,202.311 ; 174.244,86.36 179.07,86.36 ; 180.086,203.581 184.912,203.581
  Bottom Layer w2: 38.1,170.307 38.862,170.307 46.736,162.433 46.736,160.528 ; 39.776,163.398 39.726,163.449 37.084,163.449 34.036,166.497 34.036,218.059 39.116,223.139 ; 45.593,186.055 45.593,188.595 45.593,191.135 ; 45.593,196.215 45.593,193.675 45.593,191.135 ; 46.355,224.536 51.255,224.536 55.118,224.536 57.257,226.675 60.071,226.675 ; 46.355,232.156 51.255,232.156 55.499,232.156 57.023,230.632 59.964,230.632 60.071,230.525 ; 46.736,151.638 46.736,156.538 46.736,160.528 ; 54.356,156.538 54.356,151.638 66.421,151.638 67.183,150.876 ; 55.88,186.055 53.975,186.055 48.895,191.135 45.593,191.135 ; 55.88,191.135 58.547,188.468 67.437,188.468 70.612,191.643 v1(70.612,192.532) ; 58.293,205.74 58.293,210.566 59.563,211.836 62.23,211.836 63.881,213.487 63.881,216.662 61.976,218.567 53.848,218.567 51.689,220.726 41.529,220.726 39.116,223.139 ; 60.071,222.825 67.631,222.825 ; 60.071,234.375 69.028,234.375 70.104,233.299 76.962,233.299 ; 63.754,163.322 70.358,163.322 70.739,163.703 ; 70.104,228.219 70.104,225.298 67.631,222.825 ; 72.263,150.876 95.885,150.876 99.187,154.178 99.187,164.973 ; 75.311,170.942 74.041,170.942 70.739,167.64 70.739,163.703 ; 75.946,159.86 72.677,159.86 70.739,161.798 70.739,163.703 ; 75.946,162.56 81.153,162.56 86.614,157.099 ; 76.2,199.644 80.01,199.644 86.995,206.629 107.442,206.629 ; 77.089,215.011 77.089,222.825 ; v1(82.55,213.106) 82.55,212.979 85.09,215.519 85.09,218.186 ; 83.263,227.965 82.296,227.965 76.962,233.299 ; 85.852,222.825 77.089,222.825 ; 91.186,189.23 91.186,182.499 99.187,174.498 99.187,164.973 ; 91.186,194.691 102.108,194.691 107.442,200.025 107.442,206.629 ; 91.313,157.48 90.932,157.099 86.614,157.099 ; 91.313,162.941 91.44,163.068 97.282,163.068 99.187,164.973 ; 146.558,54.356 147.32,54.356 155.194,46.482 155.194,44.577 ; 148.234,47.447 148.184,47.498 145.542,47.498 142.494,50.546 142.494,102.108 147.574,107.188 ; 152.4,171.577 153.162,171.577 161.036,163.703 161.036,161.798 ; 154.051,70.104 154.051,72.644 154.051,75.184 ; 154.051,80.264 154.051,77.724 154.051,75.184 ; 154.076,164.668 154.026,164.719 151.384,164.719 148.336,167.767 148.336,219.329 153.416,224.409 ; 154.813,108.585 159.713,108.585 163.576,108.585 165.715,110.724 168.529,110.724 ; 154.813,116.205 159.713,116.205 163.957,116.205 165.481,114.681 168.422,114.681 168.529,114.574 ; 155.194,35.687 155.194,40.587 155.194,44.577 ; 159.893,187.325 159.893,189.865 159.893,192.405 ; 159.893,197.485 159.893,194.945 159.893,192.405 ; 160.655,225.806 165.555,225.806 169.418,225.806 171.557,227.945 174.371,227.945 ; 160.655,233.426 165.555,233.426 169.799,233.426 171.323,231.902 174.264,231.902 174.371,231.795 ; 161.036,152.908 161.036,157.808 161.036,161.798 ; 162.814,40.587 162.814,35.687 174.879,35.687 175.641,34.925 ; 164.338,70.104 162.433,70.104 157.353,75.184 154.051,75.184 ; 164.338,75.184 167.005,72.517 175.895,72.517 179.07,75.692 v1(179.07,76.581) ; 166.751,89.789 166.751,94.615 168.021,95.885 170.688,95.885 172.339,97.536 172.339,100.711 170.434,102.616 162.306,102.616 160.147,104.775 149.987,104.775 147.574,107.188 ; 168.529,106.874 176.089,106.874 ; 168.529,118.424 177.486,118.424 178.562,117.348 185.42,117.348 ; 168.656,157.808 168.656,152.908 180.721,152.908 181.483,152.146 ; 170.18,187.325 168.275,187.325 163.195,192.405 159.893,192.405 ; 170.18,192.405 172.847,189.738 181.737,189.738 184.912,192.913 v1(184.912,193.802) ; 172.212,47.371 178.816,47.371 179.197,47.752 ; 172.593,207.01 172.593,211.836 173.863,213.106 176.53,213.106 178.181,214.757 178.181,217.932 176.276,219.837 168.148,219.837 165.989,221.996 155.829,221.996 153.416,224.409 ; 174.371,224.095 181.931,224.095 ; 174.371,235.645 183.328,235.645 184.404,234.569 191.262,234.569 ; 178.054,164.592 184.658,164.592 185.039,164.973 ; 178.562,112.268 178.562,109.347 176.089,106.874 ; 180.721,34.925 204.343,34.925 207.645,38.227 207.645,49.022 ; 183.769,54.991 182.499,54.991 179.197,51.689 179.197,47.752 ; 184.404,43.909 181.135,43.909 179.197,45.847 179.197,47.752 ; 184.404,46.609 189.611,46.609 195.072,41.148 ; 184.404,229.489 184.404,226.568 181.931,224.095 ; 184.658,83.693 188.468,83.693 195.453,90.678 215.9,90.678 ; 185.547,99.06 185.547,106.874 ; 186.563,152.146 210.185,152.146 213.487,155.448 213.487,166.243 ; 189.611,172.212 188.341,172.212 185.039,168.91 185.039,164.973 ; 190.246,161.13 186.977,161.13 185.039,163.068 185.039,164.973 ; 190.246,163.83 195.453,163.83 200.914,158.369 ; 190.5,200.914 194.31,200.914 201.295,207.899 221.742,207.899 ; v1(191.008,97.155) 191.008,97.028 193.548,99.568 193.548,102.235 ; 191.389,216.281 191.389,224.095 ; 191.721,112.014 190.754,112.014 185.42,117.348 ; 194.31,106.874 185.547,106.874 ; v1(196.85,214.376) 196.85,214.249 199.39,216.789 199.39,219.456 ; 197.563,229.235 196.596,229.235 191.262,234.569 ; 199.644,73.279 199.644,66.548 207.645,58.547 207.645,49.022 ; 199.644,78.74 210.566,78.74 215.9,84.074 215.9,90.678 ; 199.771,41.529 199.39,41.148 195.072,41.148 ; 199.771,46.99 199.898,47.117 205.74,47.117 207.645,49.022 ; 200.152,224.095 191.389,224.095 ; 205.486,190.5 205.486,183.769 213.487,175.768 213.487,166.243 ; 205.486,195.961 216.408,195.961 221.742,201.295 221.742,207.899 ; 205.613,158.75 205.232,158.369 200.914,158.369 ; 205.613,164.211 205.74,164.338 211.582,164.338 213.487,166.243 ; 39.116,223.139 39.116,232.156 45.72,238.76 71.501,238.76 ; 46.736,160.528 56.134,160.528 61.087,155.575 85.09,155.575 86.614,157.099 ; 67.631,222.825 77.089,222.825 ; 71.501,238.76 76.962,233.299 ; 71.501,238.76 101.727,238.76 107.442,233.045 107.442,206.629 ; 147.574,107.188 147.574,116.205 154.178,122.809 179.959,122.809 ; 153.416,224.409 153.416,233.426 160.02,240.03 185.801,240.03 ; 155.194,44.577 164.592,44.577 169.545,39.624 193.548,39.624 195.072,41.148 ; 161.036,161.798 170.434,161.798 175.387,156.845 199.39,156.845 200.914,158.369 ; 176.089,106.874 185.547,106.874 ; 179.959,122.809 185.42,117.348 ; 179.959,122.809 210.185,122.809 215.9,117.094 215.9,90.678 ; 181.931,224.095 191.389,224.095 ; 185.801,240.03 216.027,240.03 221.742,234.315 221.742,207.899 ; 185.801,240.03 191.262,234.569 ; 23.241,22.225 109.855,22.225 109.855,129.286 23.241,129.286 23.241,22.225 ; 29.083,139.446 29.083,246.507 115.697,246.507 115.697,139.446 29.083,139.446 ; 137.541,23.495 137.541,130.556 224.155,130.556 224.155,23.495 137.541,23.495 ; 143.383,140.716 229.997,140.716 229.997,247.777 143.383,247.777 143.383,140.716

## Polygon pours and split planes (outlines as drawn)
no net on Bottom Layer "NONET_L02_P012" (solid, remove dead copper, pour order 12): 29.083,246.507 115.57,246.507 115.57,139.446 29.21,139.446
no net on Bottom Layer "NONET_L02_P010" (solid, remove dead copper, pour order 10): 143.383,247.777 229.87,247.777 229.87,140.716 143.51,140.716
no net on Bottom Layer "NONET_L02_P008" (solid, remove dead copper, pour order 8): 137.541,130.556 224.028,130.556 224.028,23.495 137.668,23.495
GND on Bottom Layer "GND_L02_P002" (solid, remove dead copper, pour order 2): 23.241,129.286 109.728,129.286 109.728,22.225 23.368,22.225

## Other copper
Bottom Layer:
  text "VANTHO-30W" at 223.901,193.421 h7 r90
  text "VANTHO-30W" at 109.601,192.151 h7 r90
  text "VANTHO-30W" at 218.059,76.2 h7 r90
  text "VANTHO-30W" at 103.759,74.93 h7 r90

## Text inside footprints (layer, text, board x,y; h text height)
C1: Top Overlay "+" at 65.278,116.586 h1.52 r270
C1_1: Top Overlay "+" at 179.578,117.856 h1.52 r270
C1_1_1: Top Overlay "+" at 185.42,235.077 h1.52 r270
C1_2: Top Overlay "+" at 71.12,233.807 h1.52 r270
C2: Top Overlay "+" at 51.054,74.422 h1.52 r270
C2_1: Top Overlay "+" at 165.354,75.692 h1.52 r270
C2_1_1: Top Overlay "+" at 171.196,192.913 h1.52 r270
C2_2: Top Overlay "+" at 56.896,191.643 h1.52 r270
C3: Top Overlay "+" at 66.929,32.639 h1.52 r180
C3_1: Top Overlay "+" at 181.229,33.909 h1.52 r180
C3_1_1: Top Overlay "+" at 187.071,151.13 h1.52 r180
C3_2: Top Overlay "+" at 72.771,149.86 h1.52 r180